# EAGLE board Crystal Filter v2 (EAGLE 9.1.2)
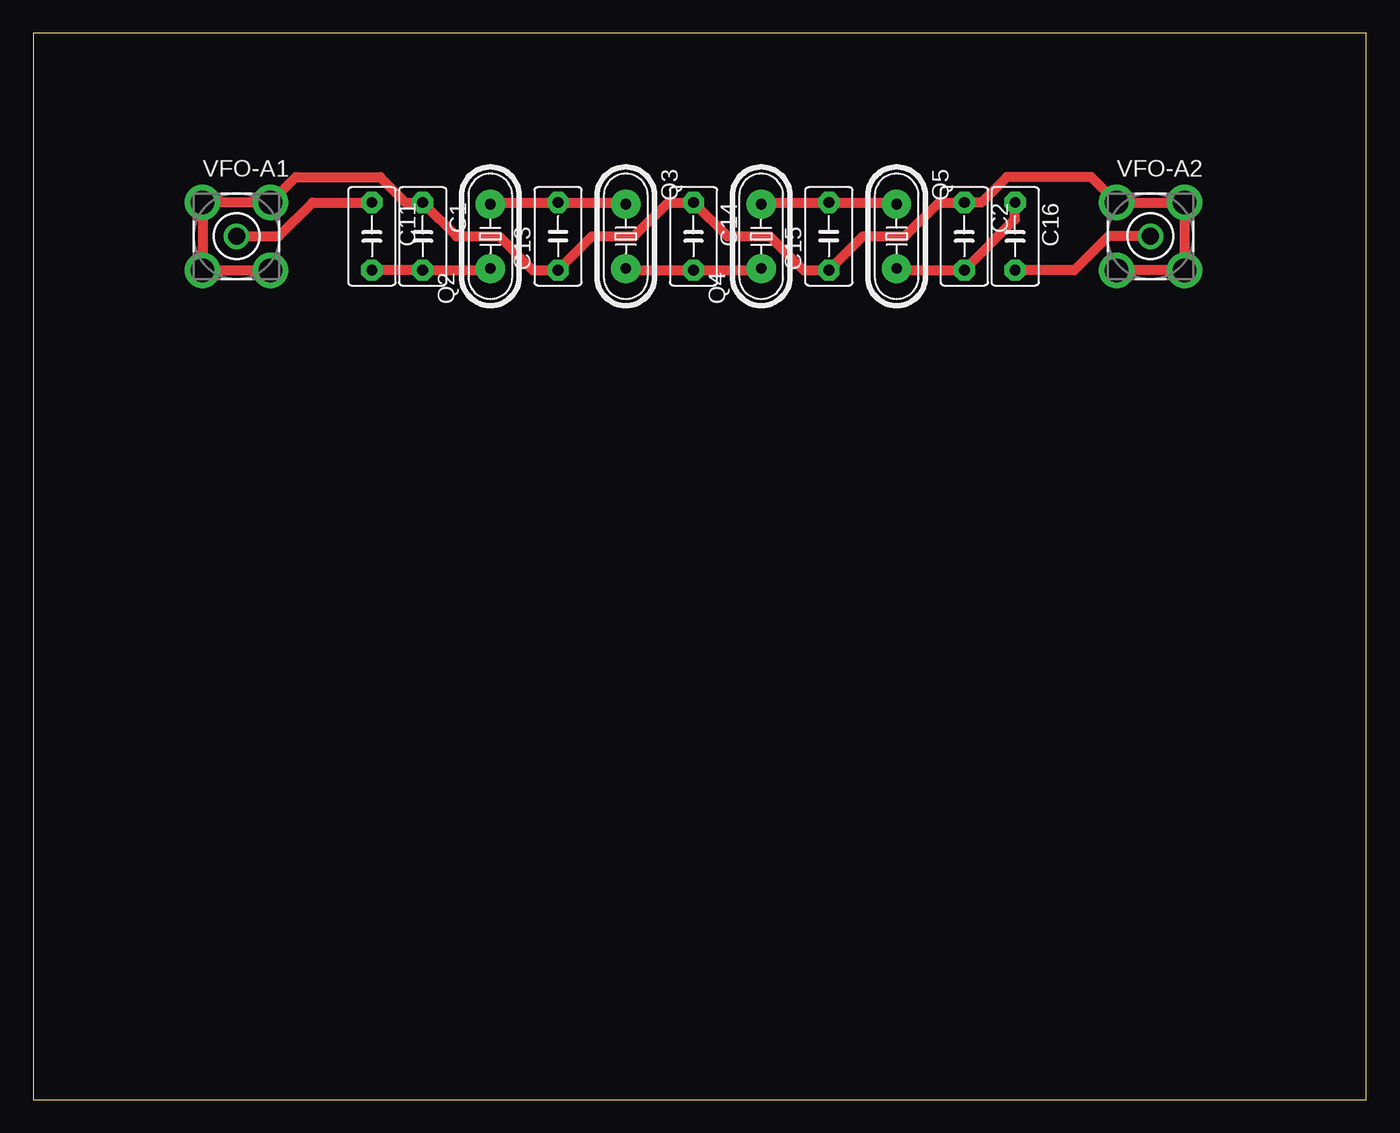
[diagram p0: board, top side]

Size 100 x 80 mm. Coordinates in mm from the lower left corner, seen from the top.
Outline: 0,0 100,0 100,80 0,80 0,0
Copper layers (1*16): Top 0.035mm / dielectric 1.5mm / Bottom 0.035mm
Design rules "default": minimum track width 6mil, minimum drill 0.35mm, track to track 6mil, track to pad 6mil, pad to pad 6mil, via to via 6mil, smd to smd 6mil, copper to edge 40mil, drill to drill 6mil, minimum pad ring 10mil, minimum via ring 8mil, stop-mask expansion 4mil, vias tented up to drill 0mil, thermal gap 10mil
Net classes: 0 default: width 0.762 mm, drill 0.762 mm, clearance 0.508 mm

## Footprints (pad centres in the part's own frame; a part is rotated, then mirrored left to right if it is on the bottom)
C5B3.5 = drill 0.813 pad 1.6 octagon: 1 -2.54,0; 2 2.54,0
HC49/S = drill 0.813 pad 2.184: 1 -2.413,0; 2 2.413,0
BU-SMA-V = drill 1.27: 1 0,0 | drill 1.778: 2 -2.55,2.55; 3 2.55,2.55; 4 2.55,-2.55; 5 -2.55,-2.55

## Placement (x,y rotation side)
C1  12pF  [C5B3.5]  29.21,64.77 270 top
C2  12pF  [C5B3.5]  69.85,64.77 270 top
C11  270pF  [C5B3.5]  25.4,64.77 270 top
C13  270pF  [C5B3.5]  39.37,64.77 90 top
C14  270pF  [C5B3.5]  49.53,64.77 270 top
C15  270pF  [C5B3.5]  59.69,64.77 90 top
C16  270pF  [C5B3.5]  73.66,64.77 270 top
Q2  [HC49/S]  34.29,64.77 90 top
Q3  [HC49/S]  44.45,64.77 270 top
Q4  [HC49/S]  54.61,64.77 90 top
Q5  [HC49/S]  64.77,64.77 270 top
VFO-A1  BU-SMA-V  [BU-SMA-V]  15.24,64.77 0 top
VFO-A2  BU-SMA-V  [BU-SMA-V]  83.82,64.77 0 top

## Library data of the parts
C1 C2 C11 C13-C16 = capacitor-wima
Q2-Q5 = crystal
VFO-A1 VFO-A2 = con-coax; OC_FARNELL: unknown; OC_NEWARK: unknown

## Nets
GND: C1.1 C2.1 C13.1 C14.1 C15.1 VFO-A1.2 VFO-A1.3 VFO-A1.4 VFO-A1.5 VFO-A2.2 VFO-A2.3 VFO-A2.4 VFO-A2.5
N$1: C1.2 C11.2 Q2.1
N$3: C16.2 VFO-A2.1
N$4: C11.1 VFO-A1.1
N$12: C2.2 C16.1 Q5.2
N$17: C13.2 Q2.2 Q3.1
N$18: C14.2 Q3.2 Q4.1
N$19: C15.2 Q4.2 Q5.1

## Tracks (layer width: path | path; a pad name or v marks a point on that pad's centre or on a via)
GND
  Top 0.762: VFO-A2.4 VFO-A2.5 | VFO-A2.4 | VFO-A2.3 VFO-A2.2 80.64,67.94 79.38,69.22 73.03,69.22 71.12,67.31 C2.1 67.94,67.31 65.41,64.77 62.23,64.77 C15.1 57.78,62.23 55.24,64.77 52.07,64.77 C14.1 47.62,67.31 45.09,64.77 41.91,64.77 C13.1 37.47,62.23 34.92,64.77 31.75,64.77 C1.1 27.94,67.31 26.04,69.22 19.68,69.22 18.41,67.94 VFO-A1.3 VFO-A1.2 | VFO-A2.3 | VFO-A2.3 VFO-A2.4 | VFO-A1.2 VFO-A1.5 | VFO-A1.5 | VFO-A1.2 | VFO-A1.5 VFO-A1.4
N$1
  Top 0.762: C11.2 C1.2 34.29,62.23 Q2.1
N$3
  Top 0.762: C16.2 78.11,62.23 80.64,64.77 VFO-A2.1
N$4
  Top 0.762: C11.1 20.95,67.31 18.41,64.77 VFO-A1.1
N$12
  Top 0.762: Q5.2 64.77,62.23 C2.2 73.66,66.04 C16.1
N$17
  Top 0.762: Q2.2 34.29,67.31 C13.2 44.45,67.31 Q3.1
N$18
  Top 0.762: Q3.2 44.45,62.23 C14.2 54.61,62.23 Q4.1
N$19
  Top 0.762: Q4.2 54.61,67.31 C15.2 64.77,67.31 Q5.1